# EAGLE board MINHF4 (EAGLE 9.2.2)
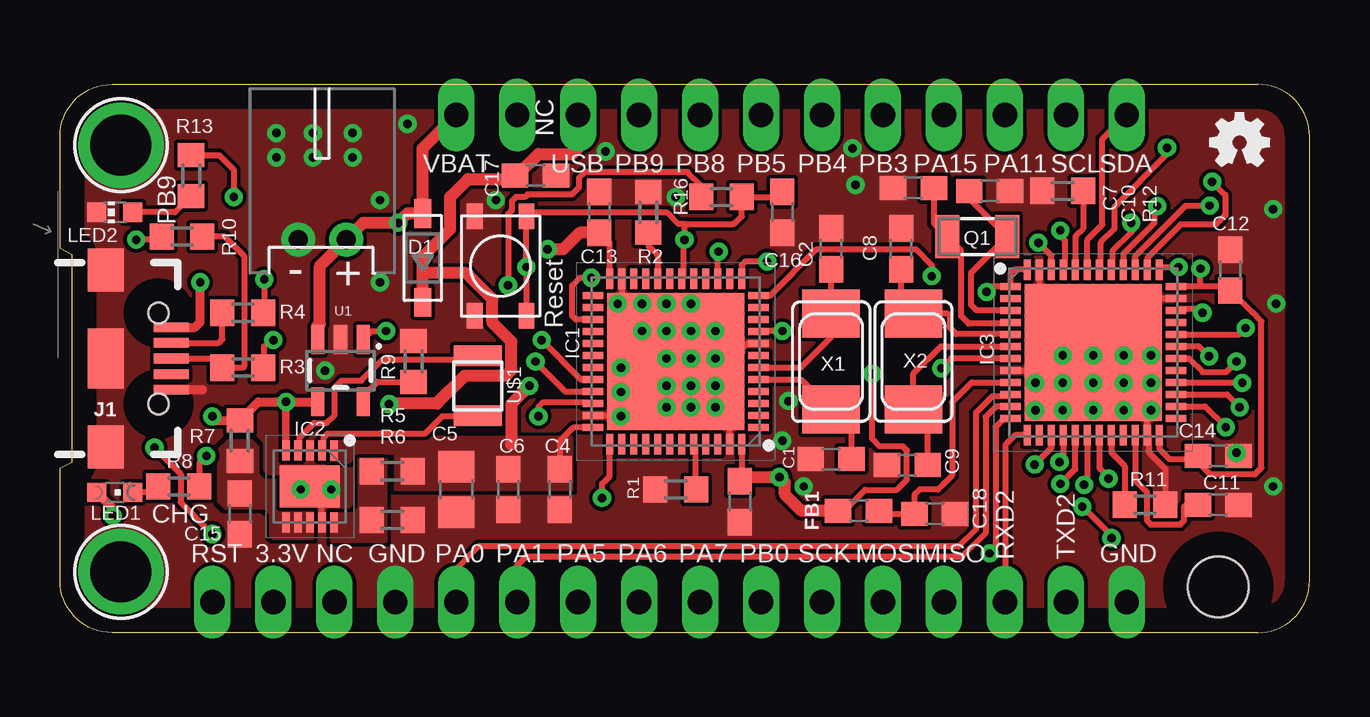
[diagram p0: board, top side]
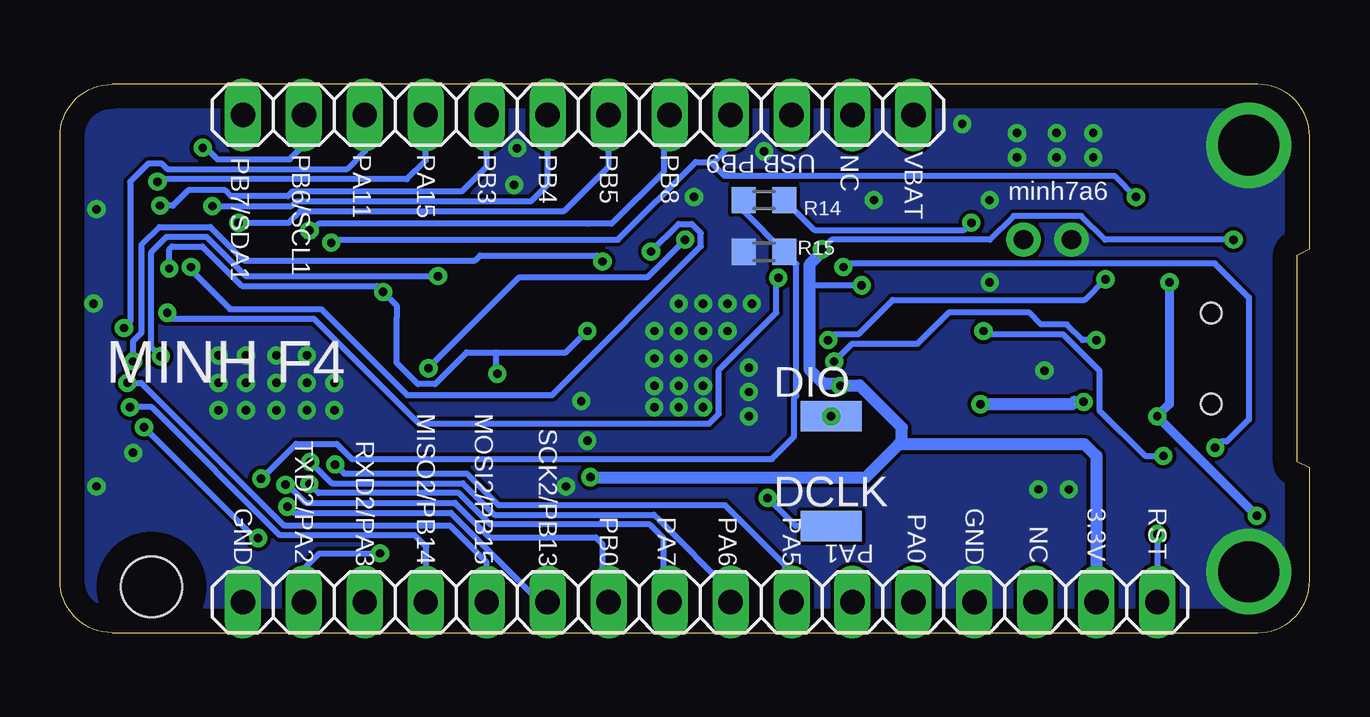
[diagram p1: board, bottom side, seen from below]

Size 52.07 x 22.86 mm. Coordinates in mm from the lower left corner, seen from the top.
Outline: 0,16 0,20.69 arc-90 2.17,22.86 49.9,22.86 arc-90 52.07,20.69 52.07,2.17 arc-90 49.9,0 2.17,0 arc-90 0,2.17 0,6.86 0.51,7.11 0.51,15.75 0,16
Copper layers (1*16): Top 0.035mm / dielectric 1.5mm / Bottom 0.035mm
Design rules "default *": minimum track width 6mil, minimum drill 0.35mm, track to track 6mil, track to pad 6mil, pad to pad 6mil, via to via 6mil, smd to smd 6mil, copper to edge 40mil, drill to drill 6mil, minimum pad ring 10mil, minimum via ring 8mil, stop-mask expansion 4mil, vias tented up to drill 15mil, thermal gap 10mil
Holes 2.54 mm at 48.26,1.91

## Footprints (pad centres in the part's own frame; a part is rotated, then mirrored left to right if it is on the bottom)
C0603 = smd 1.1 x 1: 1 -0.85,0; 2 0.85,0
C0805 = smd 1.3 x 1.5: 1 -0.95,0; 2 0.95,0
JST-PH-2-THM-RA = drill 0.8 pad 1.422: 1 1,0; 2 -1,0
SOD-123 = smd 1.2 x 0.7: A 1.85,0; C -1.85,0
SMD1,27-2,54 = smd 1.27 x 2.54: 1 0,0
0603 = smd 1.1 x 1: 1 -0.85,0; 2 0.85,0
QFN50P700X700X65-49N = smd 0.85 x 0.3: 1 -3.45,2.75; 2 -3.45,2.25; 3 -3.45,1.75; 4 -3.45,1.25; 5 -3.45,0.75; 6 -3.45,0.25; 7 -3.45,-0.25; 8 -3.45,-0.75; 9 -3.45,-1.25; 10 -3.45,-1.75; 11 -3.45,-2.25; 12 -3.45,-2.75; 25 3.45,-2.75; 26 3.45,-2.25; 27 3.45,-1.75; 28 3.45,-1.25; 29 3.45,-0.75; 30 3.45,-0.25; 31 3.45,0.25; 32 3.45,0.75; 33 3.45,1.25; 34 3.45,1.75; 35 3.45,2.25; 36 3.45,2.75 | smd 0.3 x 0.85: 13 -2.75,-3.45; 14 -2.25,-3.45; 15 -1.75,-3.45; 16 -1.25,-3.45; 17 -0.75,-3.45; 18 -0.25,-3.45; 19 0.25,-3.45; 20 0.75,-3.45; 21 1.25,-3.45; 22 1.75,-3.45; 23 2.25,-3.45; 24 2.75,-3.45; 37 2.75,3.45; 38 2.25,3.45; 39 1.75,3.45; 40 1.25,3.45; 41 0.75,3.45; 42 0.25,3.45; 43 -0.25,3.45; 44 -0.75,3.45; 45 -1.25,3.45; 46 -1.75,3.45; 47 -2.25,3.45; 48 -2.75,3.45 | smd 5.7 x 5.7: 49 0,0
SON50P300X300X100-11N = smd 0.85 x 0.3: 1 -1.5,1; 2 -1.5,0.5; 3 -1.5,0; 4 -1.5,-0.5; 5 -1.5,-1; 6 1.5,-1; 7 1.5,-0.5; 8 1.5,0; 9 1.5,0.5; 10 1.5,1 | smd 1.75 x 2.5: 11 0,0
QFN50P700X700X60-49N = smd 0.85 x 0.3: 1 -3.45,2.75; 2 -3.45,2.25; 3 -3.45,1.75; 4 -3.45,1.25; 5 -3.45,0.75; 6 -3.45,0.25; 7 -3.45,-0.25; 8 -3.45,-0.75; 9 -3.45,-1.25; 10 -3.45,-1.75; 11 -3.45,-2.25; 12 -3.45,-2.75; 25 3.45,-2.75; 26 3.45,-2.25; 27 3.45,-1.75; 28 3.45,-1.25; 29 3.45,-0.75; 30 3.45,-0.25; 31 3.45,0.25; 32 3.45,0.75; 33 3.45,1.25; 34 3.45,1.75; 35 3.45,2.25; 36 3.45,2.75 | smd 0.3 x 0.85: 13 -2.75,-3.45; 14 -2.25,-3.45; 15 -1.75,-3.45; 16 -1.25,-3.45; 17 -0.75,-3.45; 18 -0.25,-3.45; 19 0.25,-3.45; 20 0.75,-3.45; 21 1.25,-3.45; 22 1.75,-3.45; 23 2.25,-3.45; 24 2.75,-3.45; 37 2.75,3.45; 38 2.25,3.45; 39 1.75,3.45; 40 1.25,3.45; 41 0.75,3.45; 42 0.25,3.45; 43 -0.25,3.45; 44 -0.75,3.45; 45 -1.25,3.45; 46 -1.75,3.45; 47 -2.25,3.45; 48 -2.75,3.45 | smd 5.7 x 5.7: 49 0,0
USB-B-MICRO-SMD = smd 1.45 x 0.4: D+ 2.725,0; D- 2.725,0.65; GND 2.725,-1.3; ID 2.725,-0.65; VBUS 2.725,1.3 | smd 1.5 x 1.8: SHIELD1 0,3.685; SHIELD2 0,-3.685 | smd 1.5 x 2.5: SHIELD3 0,0 | hole 0.85: 2.2,1.9; 2.2,-1.9
1X12 = drill 1.016 long: 1 -13.97,0; 2 -11.43,0; 3 -8.89,0; 4 -6.35,0; 5 -3.81,0; 6 -1.27,0; 7 1.27,0; 8 3.81,0; 9 6.35,0; 10 8.89,0; 11 11.43,0; 12 13.97,0
1X16 = drill 1.016 long: 1 -19.05,0; 2 -16.51,0; 3 -13.97,0; 4 -11.43,0; 5 -8.89,0; 6 -6.35,0; 7 -3.81,0; 8 -1.27,0; 9 1.27,0; 10 3.81,0; 11 6.35,0; 12 8.89,0; 13 11.43,0; 14 13.97,0; 15 16.51,0; 16 19.05,0
CHIPLED_0603 = smd 0.8 x 0.8: A 0,-0.75; C 0,0.75
CHIP-LED0603 = smd 0.8 x 0.8: A 0,-0.75; C 0,0.75
3.2X1.5 = smd 1 x 1.8: 1 -1.25,0; 2 1.25,0
R0603 = smd 1 x 1.1: 1 -0.85,0; 2 0.85,0
SOT23-5 = smd 0.55 x 1.2: 1 -0.95,-1.3; 2 0,-1.3; 3 0.95,-1.3; 4 0.95,1.3; 5 -0.95,1.3
SWPA25012S = smd 0.85 x 2: P$1 -1.25,0; P$2 1.25,0
4.2X3.25 = smd 1.05 x 0.65: P$1 0,0; P$2 4.15,0; P$3 4.15,2.15; P$4 0,2.15
NX5032 = smd 2 x 2.4: P$1 2,0; P$2 -2,0

## Placement (x,y rotation side)
C1  22pF  [C0603]  32.13,7.24 180 top
C2  22pF  [C0603]  32.13,16 90 top
C3  100nF  [C0603]  28.32,5.46 270 top
C4  100nF  [C0603]  20.83,5.97 270 top
C5  10uF  [C0805]  16.51,5.97 270 top
C6  10uF  [C0603]  18.67,5.97 270 top
C7  6.8pF  [C0603]  35.56,18.54 180 top
C8  22pF  [C0603]  35.05,16 90 top
C9  22pF  [C0603]  35.31,6.99 180 top
C10  6.8pF  [C0603]  38.73,18.41 0 top
C11  4.7uF  [C0603]  48.26,5.33 0 top
C12  100nF  [C0603]  48.77,15.11 90 top
C13  100nF  [C0603]  22.48,17.53 90 top
C14  100nF  [C0603]  48.26,7.37 0 top
C15  100nF  [C0603]  7.49,4.95 270 top
C16  100nF  [C0603]  30.1,17.53 270 top
C17  10uF  [C0603]  19.81,19.05 0 top
C18  100nF  [C0603]  36.45,4.95 0 top
CN1  [JST-PH-2-THM-RA]  10.92,16.38 0 top
D1  [SOD-123]  15.11,15.62 90 top
DCLK  [SMD1,27-2,54]  19.94,4.45 270 bottom
DIO  [SMD1,27-2,54]  19.94,9.02 270 bottom
FB1  30O/1.8A  [0603]  33.27,5.08 0 top
IC1  STM32F103CBU6  [QFN50P700X700X65-49N]  25.65,11.3 180 top
IC2  TPS63000DRCT  [SON50P300X300X100-11N]  10.41,6.1 270 top
IC3  STM32F411CEU6  [QFN50P700X700X60-49N]  43.05,11.68 0 top
J1  [USB-B-MICRO-SMD]  1.91,11.43 0 top
JP1  [1X12]  30.48,21.59 0 bottom
JP2  [1X16]  25.4,1.27 180 bottom
LED1  [CHIPLED_0603]  2.29,5.84 270 top
LED2  [CHIP-LED0603]  2.29,17.53 90 top
LOGO1  OSHW-LOGOMINI  [OSHW-LOGO-MINI]  49.15,20.45 0 top
Q1  [3.2X1.5]  38.23,16.51 180 top
R1  100k  [R0603]  25.65,5.97 180 top
R2  100k  [R0603]  24.51,17.53 270 top
R3  22  [R0603]  7.62,11.05 180 top
R4  22  [R0603]  7.62,13.34 180 top
R5  1M  [R0603]  13.84,6.73 0 top
R6  178k  [R0603]  13.84,4.7 180 top
R7  100k  [R0603]  7.49,8 90 top
R8  1k  [R0603]  4.95,6.1 180 top
R9  10k  [R0603]  14.73,11.3 90 top
R10  10k  [R0603]  5.08,16.51 180 top
R11  10k  [R0603]  45.21,5.33 180 top
R12  10k  [R0603]  41.78,18.41 180 top
R13  1k  [R0603]  5.46,19.05 270 top
R14  100k  [R0603]  22.73,18.03 0 bottom
R15  100k  [R0603]  22.73,15.88 0 bottom
R16  10k  [R0603]  27.56,18.16 180 top
U1  MCP73831  [SOT23-5]  11.68,10.92 180 top
U$1  SWPA252012S-INDUCTOR  [SWPA25012S]  17.4,10.29 270 top
U$2  4.2X3.25-TACTILE-SWITCH  [4.2X3.25]  19.43,13.21 90 top
X1  [NX5032]  32.13,11.3 90 top
X2  [NX5032]  35.56,11.3 90 top

## Library data of the parts
C1-C18 = rcl; SPICEPREFIX: C
CN1 D1 X1 X2 = adafruit
DCLK DIO = wirepad
FB1 = SPEAR; PROD_ID: NDUC-13805
IC1 = LCSC; ALLIED_NUMBER: 70521209; ALLIED_PRICE-STOCK: http://www.alliedelec.com/stmicroelectronics-stm32f103cbu6/70521209/; HEIGHT: 0.65mm; MANUFACTURER_NAME: STMicroelectronics; MANUFACTURER_PART_NUMBER: STM32F103CBU6; MOUSER_PART_NUMBER: 511-STM32F103CBU6; MOUSER_PRICE-STOCK: https://www.mouser.com/Search/Refine.aspx?Keyword=511-STM32F103CBU6; RS_PART_NUMBER: 1687243; RS_PRICE-STOCK: http://uk.rs-online.com/web/p/products/1687243
IC2 = LCSC; DESCRIPTION: TPS63000DRCT Buck/Boost Converter, 1.2A, Adjustable, 1.2 5.5 V, 1500 kHz, 10-Pin SON EP; HEIGHT: 1mm; MANUFACTURER_NAME: Texas Instruments; MANUFACTURER_PART_NUMBER: TPS63000DRCT; MOUSER_PART_NUMBER: 595-TPS63000DRCT; MOUSER_PRICE-STOCK: https://www.mouser.com/Search/Refine.aspx?Keyword=595-TPS63000DRCT; RS_PART_NUMBER: 0389334P; RS_PRICE-STOCK: http://uk.rs-online.com/web/p/products/0389334P
IC3 = LCSC; ARROW_PART_NUMBER: STM32F411CEU6; DESCRIPTION: 32-Bit MCU 512K Flash 100MHz UFQFPN48 STMicroelectronics STM32F411CEU6, 32bit ARM Cortex M4 MCU, 100MHz, 512 kB Flash, 48-Pin UFQFPN; HEIGHT: 0.6mm; MANUFACTURER_NAME: STMicroelectronics; MANUFACTURER_PART_NUMBER: STM32F411CEU6
J1 = SparkFun-Connectors; PROD_ID: CONN-11752
JP1 JP2 = pinhead
LED1 LED2 = led
LOGO1 = SparkFun-Aesthetics
Q1 = crystal-geyer_V1_0
R1-R16 = rcl; SPICEPREFIX: R
U1 = SparkFun-IC-Power; PROD_ID: IC-09995
U$1 U$2 = LCSC

## Nets
3.3V: C3.1 C4.1 C5.1 C6.1 C12.1 C13.1 C14.1 FB1.1 IC1.9 IC1.24 IC1.36 IC1.48 IC2.1 IC3.1 IC3.24 IC3.36 IC3.48 JP2.2 R5.2 R10.2 R16.2
5V: C17.1 D1.C IC2.5 J1.VBUS JP1.10 LED1.A R7.2 U1.4
D+: J1.D+ R3.2 R10.1
D-: J1.D- R4.2
DCLK: DCLK.1 IC1.37
DIO: DIO.1 IC1.34
EN: JP1.11
GND: C1.2 C2.2 C3.2 C4.2 C5.2 C6.2 C7.2 C8.2 C9.2 C10.2 C11.2 C12.2 C13.2 C14.2 C15.2 C16.2 C17.2 C18.2 CN1.2 IC1.8 IC1.23 IC1.35 IC1.47 IC1.49 IC2.3 IC2.9 IC2.11 IC3.8 IC3.23 IC3.35 IC3.47 IC3.49 J1.GND J1.SHIELD1 J1.SHIELD2 J1.SHIELD3 JP2.4 JP2.16 LED2.C R1.2 R2.1 R6.1 R9.2 R11.1 R12.2 R15.1 U1.2 U$2.P$3 U$2.P$4
MISO: IC3.27 JP2.13
MOSI: IC3.28 JP2.12
N$1: C15.1 IC2.6 IC2.7 IC2.8 R7.1
N$2: IC2.2 U$1.P$2
N$3: C1.1 IC1.5 X1.P$2
N$4: C2.1 IC1.6 X1.P$1
N$5: IC1.44 R1.1
N$6: IC2.4 U$1.P$1
N$7: IC1.20 R2.2
N$8: IC1.33 R3.1
N$9: IC1.32 R4.1
N$10: LED1.C R8.2
N$11: R8.1 U1.1
N$12: R9.1 U1.5
N$13: LED2.A R13.2
N$14: IC2.10 R5.1 R6.2
N$15: C7.1 IC3.4 Q1.2
N$16: C10.1 IC3.3 Q1.1
N$17: C18.1 FB1.2 IC3.9
N$18: C8.1 IC3.5 X2.P$1
N$19: C9.1 IC3.6 X2.P$2
N$20: C11.1 IC3.22
N$21: IC3.20 R11.2
N$25: IC3.33
N$27: IC3.29
N$31: IC3.25
N$33: IC3.44 R12.1
N$47: IC3.21
NC: JP2.3
PA0: IC3.10 JP2.5
PA1: IC3.11 JP2.6
PA4: IC3.14
PA5: IC3.15 JP2.7
PA6: IC3.16 JP2.8
PA7: IC3.17 JP2.9
PA11: IC3.32 JP1.3
PA15: IC3.38 JP1.4
PB0: IC3.18 JP2.10
PB1: IC3.19 R14.1 R15.2
PB3: IC3.39 JP1.5
PB4: IC3.40 JP1.6
PB5: IC3.41 JP1.7
PB8: IC3.45 JP1.8
PB9: IC3.46 JP1.9 R13.1
RST: C16.1 IC1.18 IC3.7 JP2.1 R16.1 U$2.P$1 U$2.P$2
RXD: IC1.12 IC3.31
RXD_2: IC3.13 JP2.14
SCK: IC3.26 JP2.11
SCL: IC3.42 JP1.2
SDA: IC3.43 JP1.1
SWCLK: IC1.15 IC3.37
SWDIO: IC1.27 IC3.34
TXD: IC1.13 IC3.30
TXD_2: IC3.12 JP2.15
VBAT: CN1.1 D1.A JP1.12 R14.2 U1.3

## Tracks (layer width: path | path; a pad name or v marks a point on that pad's centre or on a via)
3.3V  (via drill 0.35)
  Top 0.254: 47.62,14.43 48.6,14.43 C12.1 49.67,13.36 50.06,12.97 50.06,6.87 49.78,6.59 47.94,6.59 47.28,7.24 | 47.62,14.43 IC3.36 | IC1.24 22.9,16.25 C13.1 | IC3.24 45.8,7.66 46.23,7.24 47.28,7.24 | 47.28,7.24 C14.1 | C6.1 18.75,6.9 | IC1.36 21.38,8.55 20.83,8 C4.1 | IC3.48 39.77,15.13 39.6,14.96 IC3.1 38.84,14.43 v38.61,14.2 | v30.1,12.57 29.12,12.57 IC1.9 | 47.62,14.43 47.52,14.54 v47.52,15.18 | R10.2 4.1,16.38 v3.17,16.38 | FB1.1 32.68,5.08 33.55,5.95 34.87,5.95 35.28,6.37 35.28,7.6 35.12,7.76 34.15,7.76 33.85,8.06 v33.85,10.79 | R16.2 26.71,18.64 26.14,19.2 21.86,19.2 21.62,18.96 21.62,18.56 21.33,18.27 19.48,18.27 19.38,18.16 18.99,18.16 18.83,18 18.83,17.61 18.67,17.45 v18.67,14.48 | IC1.48 28.4,6.6 28.4,6.48 28.4,6.39 C3.1
  Top 0.508: 18.8,7.85 18.8,7.86 18.8,9.53 v19.56,10.29 | FB1.1 30.89,5.08 30.2,5.77 30.2,6.25 v29.97,6.48 28.4,6.48 | C13.1 21.66,16.68 21.39,16.41 20.95,15.98 v20.32,15.98
  Bottom 0.254: 33.91,11.68 35.13,11.68 36.45,10.37 37.16,10.37 38.05,11.25 38.05,13.13 38.05,13.64 v38.61,14.2 38.86,14.45 44.49,14.45 46.14,16.1 47.4,16.1 47.52,15.98 v47.52,15.18 | 33.91,11.68 30.99,11.68 v30.1,12.57 | 33.91,11.68 33.91,10.86 v33.85,10.79 | v3.17,16.38 8.52,16.38 9.51,17.37 12.33,17.37 13.32,16.38 19.91,16.38 v20.32,15.98 | v18.67,14.48 20.85,14.48
  Bottom 0.508: 16.99,7.85 16.99,8.55 18.75,10.31 19.53,10.31 v19.56,10.29 19.66,10.39 20.26,10.39 20.85,10.98 20.85,13.08 20.85,13.84 20.85,14.22 20.85,14.48 20.85,15.34 20.45,15.75 20.45,15.85 v20.32,15.98 | v29.97,6.48 18.5,6.48 17.12,7.85 16.99,7.85 | 16.99,7.85 9.38,7.85 8.89,7.37 JP2.2
  pour Top (no thermals): 11.3,7.11 12.06,7.11 12.19,7.24 12.19,7.49 13.97,7.49 13.97,5.97 21.34,5.97 21.34,8.13 11.3,8.13
5V  (via drill 0.35)
  Top 0.305: IC2.5 v9.41,9.62
  Top 0.381: J1.VBUS 5.62,12.73 5.84,12.95 v5.84,14.61 | v6.35,9.02 6.52,8.85 R7.2 8.26,9.62 9.02,9.62 v9.41,9.62 v9.42,9.62 U1.4 | LED1.A 2.2,5.17 v2.2,4.87
  Top 0.508: v13.72,9.53 13.74,9.55 15.7,9.55 16.86,10.71 18.57,10.71 18.8,10.94 18.8,12.13 18.01,12.92 18.01,13.9 16.93,14.99 15.11,14.99 | JP1.10 21.59,20.19 21.35,19.96 19.94,19.96 19.04,19.05 C17.1 18.82,18.91 17,18.91 16.26,18.16 16.26,16.82 15.11,15.68 15.11,14.99 | D1.C 15.11,14.99
  Bottom 0.381: v5.84,14.61 5.84,9.53 v6.35,9.02 v2.2,4.87
  Bottom 0.508: v13.72,9.53 9.9,9.53 9.8,9.62 v9.42,9.62
D+
  Top 0.254: J1.D+ 6.39,11.43 R3.2 7.62,11.05 7.69,11.12 7.69,15.68 6.86,16.51 R10.1
D-
  Top 0.254: J1.D- 6.62,12.08 6.77,12.23 R4.2
DCLK  (via drill 0.35)
  Top 0.254: v22.59,5.61 22.59,6.2 22.9,6.52 IC1.37
  Bottom 0.254: DCLK.1 21.42,4.45 v22.59,5.61
DIO  (via drill 0.35)
  Top 0.254: IC1.34 22.06,9.55 22.01,9.61 20.14,9.61 19.94,9.41 DIO.1
  other vias: 19.94,9.02
GND  (via drill 0.35, 2.54)
  Top 0.254: v45.47,9.27 45.3,9.11 IC3.23 45.37,8.16 45.37,7.52 46.06,6.83 46.06,6.35 R11.1 | IC1.47 27.9,8.76 | 27.9,8.76 27.9,10.83 v27.3,11.43 28.19,11.43 28.4,11.64 28.4,11.82 28.63,12.05 IC1.8 | IC1.23 23.4,13.88 v23.24,13.72 | IC1.35 27.61,9.05 27.9,8.76 | IC3.8 40.37,10.93 40.64,10.67 v40.64,10.41 | IC3.47 40.8,12.54 v41.78,11.56 | IC3.35 45.63,13.93 45.47,14.1 v45.47,11.56 | IC2.9 10.91,5.58 v11.3,5.97
  Top 0.381: J1.GND 5.94,10.13
  other vias: 40.64,9.27 41.78,9.27 43.05,9.27 44.32,9.27 43.05,10.41 44.32,10.41 45.47,10.41 41.78,10.41 43.05,11.56 44.32,11.56 24.26,13.72 25.27,13.72 26.29,13.72 24.26,12.57 25.27,12.57 26.29,12.57 27.3,12.57 26.29,11.43 9.02,20.83 10.54,20.83 11.05,10.92 22.73,20.07 18.16,18.03 50.55,6.1 12.19,20.83 50.67,13.72 50.55,17.65 49.02,7.49 12.19,19.81 10.54,19.81 9.02,19.81 30.99,6.1 13.34,14.61 25.27,11.43 25.27,10.29 26.29,10.29 2.54,20.32 2.54,2.54 27.3,10.29 25.27,9.4 26.29,9.4 27.3,9.4 33.02,20.19 33.15,18.67 23.37,11.05 23.37,10.03 23.37,9.02 30.35,9.65 30.1,8 13.34,18.03 14.48,21.21 25.65,18.16 10.03,5.97
  pour Top (rank 6, no thermals): -0.25,24.77 -0.25,-0.64 53.21,-0.64 53.21,24.77
  pour Bottom (rank 6, no thermals): -0.25,23.75 -0.25,-0.64 52.45,-0.64 52.45,23.75
MISO  (via drill 0.35)
  Top 0.254: IC3.27 48.62,9.93 v49.15,9.4
  Bottom 0.254: v49.15,9.4 48.25,9.4 42.91,4.06 37.29,4.06 36.81,3.57 36.81,1.37 36.83,1.35 JP2.13
MOSI  (via drill 0.35)
  Top 0.254: IC3.28 49.24,10.43 v49.26,10.41
  Bottom 0.254: v49.26,10.41 48.69,10.41 42.74,4.47 35.83,4.47 34.29,2.93 JP2.12
N$1
  pour Top (no thermals): 6.86,5.21 8.51,5.21 8.76,4.95 8.76,4.06 8.89,3.94 10.54,3.94 10.54,5.21 9.4,6.35 8.51,6.35 8.26,6.6 8.26,7.75 8,8 6.99,8 6.6,7.62 6.6,5.46
N$2
  Top 0.152: 17.39,9.03 U$1.P$2
  Top 0.254: IC2.2 10.98,7.67 10.98,8.14 11.15,8.3 15.21,8.3 15.94,9.03 17.39,9.03
N$3
  Top 0.254: IC1.5 30.88,10.55 X1.P$2 32.98,8.45 C1.1
N$4
  Top 0.254: C2.1 X1.P$1 32.13,12.32 30.86,11.05 IC1.6
N$5
  Top 0.254: R1.1 26.48,6 26.48,7.78 IC1.44
N$6
  Top 0.254: IC2.4 9.98,7.67 9.98,8.14 10.59,8.74 11.12,8.74 11.45,9.06 11.45,10.21 11.73,10.5 12.56,10.5 13.43,11.37 17.24,11.37 U$1.P$1
N$7
  Top 0.254: R2.2 24.51,16.13 24.9,15.74 IC1.20
N$8  (via drill 0.35)
  Top 0.254: R3.1 8.51,11.09 8.51,11.94 8.76,12.19 v8.89,12.19 | v19.81,11.3 21.06,10.05 IC1.33
  Bottom 0.254: v8.89,12.19 9.46,12.19 10.12,12.85 11.2,12.85 11.68,13.34 15.05,13.34 16.34,12.04 19.07,12.04 v19.81,11.3
N$9  (via drill 0.35)
  Top 0.254: IC1.32 21.7,10.55 v20.07,12.19 | v8.51,14.73 8.51,13.37 R4.1
  Bottom 0.254: v20.07,12.19 19.81,12.45 18.8,12.45 17.37,13.87 9.37,13.87 v8.51,14.73
N$10
  Top 0.254: R8.2 3.85,5.84 LED1.C
N$11  (via drill 0.35)
  Top 0.254: v6.1,7.37 5.8,7.07 R8.1 | U1.1 12.98,12.57 v13.59,12.57
  Bottom 0.254: v6.1,7.37 6.86,7.37 8.76,9.27 8.76,10.92 10.29,12.45 13.46,12.45 v13.59,12.57
N$12
  Top 0.254: U1.5 12.63,9.88 13.21,10.45 R9.1
N$13
  Top 0.254: R13.2 4.79,17.53 LED2.A
N$14
  pour Top (rank 2, no thermals): 11.3,4.95 11.3,3.81 13.59,3.81 13.59,7.49 12.45,7.49 12.45,5.21 12.19,4.95
N$15
  Top 0.254: IC3.4 39.55,12.88 37.86,12.88 37.54,13.19 37.54,15.94 36.97,16.52 | C7.1 36.41,17.08 36.97,16.52 | Q1.2 36.97,16.52
N$16
  Top 0.254: C10.1 37.88,18.1 Q1.1 37.95,14.98 37.95,13.68 38.19,13.43 IC3.3
N$17
  Top 0.254: IC3.9 37.99,10.43 37.17,9.61 37.17,6.56 36.82,6.21 36.81,6.21 36.58,5.97 35.81,5.97 35.6,5.75 C18.1 34.25,4.95 FB1.2
N$18
  Top 0.254: C8.1 35.05,13.81 X2.P$1 35.81,13.3 36.99,13.3 37.08,13.21 37.08,12.7 37.34,12.45 39.59,12.45 IC3.5
N$19
  Top 0.254: C9.1 36.16,8.71 X2.P$2 35.56,10.79 36.7,11.93 IC3.6
N$20
  Top 0.254: IC3.22 44.8,6.34 45.28,5.86 45.28,4.67 45.45,4.5 46.68,4.5 46.84,4.67 46.84,5.25 46.93,5.33 C11.1
N$21
  Top 0.254: IC3.20 43.8,7.5 44.36,6.95 R11.2
N$33
  Top 0.254: R12.1 42.63,16.85 42.3,16.52 IC3.44
PA0
  Top 0.254: IC3.10 39.53,9.86 38.86,9.86 38.16,9.16 38.16,4.31 37.44,3.58 17.43,3.58 16.51,2.67 JP2.5
PA1
  Top 0.254: IC3.11 39.01,9.43 38.56,8.99 38.56,4.14 37.6,3.17 19.43,3.17 19.05,2.79 JP2.6
PA5  (via drill 0.35)
  Top 0.254: IC3.15 41.3,7.7 v40.61,7
  Bottom 0.254: v40.61,7 40.23,6.63 35.11,6.63 33.8,5.32 24.37,5.32 21.84,2.79 21.84,1.52 JP2.7
PA6  (via drill 0.35)
  Top 0.254: IC3.16 41.8,7.4 41.65,7.24 v41.65,7.11
  Bottom 0.254: v41.65,7.11 40.75,6.22 35.28,6.22 33.97,4.91 27.32,4.91 27.08,4.67 24.14,1.73 24.14,1.3 JP2.8
PA7  (via drill 0.35)
  Top 0.254: v41.68,6.2 42.3,6.82 42.3,7.75 IC3.17
  Bottom 0.254: v41.68,6.2 41.3,5.81 35.45,5.81 34.14,4.51 27.49,4.51 27.11,4.13 26.92,3.94 26.92,1.52 JP2.9
PA11  (via drill 0.35)
  Top 0.254: v49.4,12.7 49.14,12.43 IC3.32
  Bottom 0.254: JP1.3 39.37,20.07 40.11,19.33 47.61,19.33 47.84,19.56 48.39,19.56 49.15,18.8 49.15,12.95 v49.4,12.7
PA15  (via drill 0.35)
  Top 0.254: v48.01,18.8 48.56,18.24 48.56,17.4 48.17,17.02 46.7,17.02 45.3,15.62 IC3.38
  Bottom 0.254: v48.01,18.8 47.9,18.9 37.62,18.9 36.83,19.68 JP1.4
PB0  (via drill 0.35)
  Top 0.254: IC3.18 42.8,6.29 v42.67,6.16
  Bottom 0.254: v42.67,6.16 42.55,6.04 42.45,6.04 41.82,5.41 35.62,5.41 34.19,3.98 29.76,3.98 29.46,3.68 29.46,1.52 JP2.10
PB1  (via drill 0.35)
  Top 0.254: IC3.19 43.31,6.86 43.69,6.48 v43.69,6.42
  Bottom 0.254: R14.1 23.58,17.57 R15.2 21.38,15.38 21.38,9.87 21.49,9.77 21.49,8.16 22.41,7.24 39.91,7.24 40.55,7.87 42.23,7.87 v43.69,6.42
PB3  (via drill 0.35)
  Top 0.254: IC3.39 44.8,15.7 46.91,17.8 v47.9,17.8
  Bottom 0.254: v47.9,17.8 47.37,17.8 46.73,18.44 45.19,18.44 44.95,18.2 42.58,18.2 42.38,18.39 35.33,18.39 34.29,19.43 JP1.5
PB4  (via drill 0.35)
  Top 0.254: v45.72,17.78 45.59,17.66 45.59,17.06 44.3,15.77 IC3.40
  Bottom 0.254: v45.72,17.78 42.42,17.78 42.22,17.98 32.44,17.98 31.75,18.67 JP1.6
PB5  (via drill 0.35)
  Top 0.254: IC3.41 43.87,15.21 43.87,15.92 44.63,16.68 v44.63,17.09
  Bottom 0.254: v44.63,17.09 42.54,17.09 42.05,17.58 31.06,17.58 29.21,19.43 JP1.7
PB8  (via drill 0.35)
  Top 0.254: v41.68,16.76 41.8,16.64 41.8,16.43 41.86,16.37 41.86,15.19 IC3.45
  Bottom 0.254: v41.68,16.76 41.57,16.76 41.29,17.04 30.1,17.04 29.08,17.04 26.92,19.2 26.92,21.34 JP1.8
PB9  (via drill 0.35)
  Top 0.254: IC3.46 41.3,15.72 v40.77,16.26 | v7.24,18.16 7.24,19.3 6.64,19.9 R13.1
  Bottom 0.254: v40.77,16.26 40.64,16.38 28.83,16.38 25.59,19.62 24.83,19.62 24.45,20 | 24.45,20 24.89,19.56 24.38,19.05 8.13,19.05 v7.24,18.16 | 24.45,20 24.38,20.07 24.32,20.13 | 24.32,20.13 24.13,20.32 | JP1.9 24.13,20.32 | 24.13,20.32 24.32,20.13
RST  (via drill 0.35)
  Top 0.254: IC3.7 37.13,11.43 v36.72,11.02 | IC1.18 25.98,14.82 25.98,16.34 v26.02,16.38 26.02,17.03 | v3.94,7.71 5.02,6.62 5.02,5.43 v6.35,4.1 | C16.1 29.88,18.16 R16.1 28.41,17.36 28.08,17.03 26.02,17.03 | 26.02,17.03 25.77,17.03 25.29,17.5 19.58,17.5 U$2.P$2 v19.43,15.24 U$2.P$1
  Bottom 0.254: v26.02,16.38 27.59,14.81 32.93,14.81 v36.72,11.02 | v3.94,7.71 3.69,7.96 3.46,7.96 2.54,8.88 2.54,13.98 3.95,15.39 19.28,15.39 v19.43,15.24 | v6.35,4.1 JP2.1
RXD  (via drill 0.35)
  Top 0.254: IC1.12 29.59,14.05 31.52,15.98 33,15.98 35.67,15.98 36.32,15.33 v36.32,14.86 | v47.88,11.52 47.47,11.93 IC3.31
  Bottom 0.254: v47.88,11.52 48.26,11.9 48.26,15.88 47.62,16.51 45.97,16.51 44.32,14.86 39.62,14.86 v36.32,14.86
RXD_2
  Top 0.254: IC3.13 39.8,8.23 39.41,7.85 39.41,1.31 JP2.14
SCK  (via drill 0.35)
  Top 0.254: IC3.26 47.7,9.43 v48.57,8.57 | v42.6,5.25 43.81,4.03 v43.81,3.94
  Bottom 0.254: v48.57,8.57 43.92,3.91 v43.81,3.94 | v42.6,5.25 42.34,5 35.79,5 32.05,1.27 JP2.11
SCL  (via drill 0.35)
  Top 0.254: v46.12,20.21 46.12,19.94 43.94,17.76 43.94,16.84 43.37,16.27 43.37,15.21 IC3.42
  Bottom 0.254: v46.12,20.21 45.99,20.21 45.52,19.74 42.49,19.74 41.91,20.32 JP1.2
SDA
  Top 0.254: IC3.43 42.8,16.39 43.43,17.02 43.43,20.57 JP1.1
SWCLK  (via drill 0.35)
  Top 0.254: IC1.15 27.4,15.85 v27.45,15.89 | IC3.37 45.91,15.24 v46.61,15.24
  Bottom 0.254: v27.45,15.89 26.29,17.04 25.75,17.04 25.36,16.66 25.36,16.11 31.57,9.91 31.75,9.91 37.61,9.91 41.19,13.49 44.98,13.49 46.61,15.11 v46.61,15.24
SWDIO  (via drill 0.35)
  Top 0.254: v47.6,13.34 47.45,13.49 46.56,13.49 IC3.34 | IC1.27 21.49,13.05 21.34,13.21 21.34,14.48 21.65,14.79 v22.14,14.79
  Bottom 0.254: v47.6,13.34 47.6,13.32 47.36,13.08 41.48,13.08 37.12,8.71 25.03,8.71 24.61,9.13 24.61,10.95 22.23,13.34 22.23,14.71 v22.14,14.79
TXD  (via drill 0.35)
  Top 0.254: IC3.30 47.04,11.43 47.61,10.87 48.58,10.87 v49.02,11.3 | v29.46,15.47 28.55,15.47 28.4,15.32 IC1.13
  Bottom 0.254: v49.02,11.3 49.02,12.15 48.67,12.51 48.67,16.17 47.92,16.92 45.81,16.92 44.41,15.52 34.77,15.52 34.57,15.72 29.71,15.72 v29.46,15.47
TXD_2  (via drill 0.35)
  Top 0.254: IC3.12 39.35,8.93 38.99,8.57 38.99,3.56 v38.73,3.3
  Bottom 0.254: v38.73,3.3 41.27,3.3 41.91,2.67 JP2.15
VBAT  (via drill 0.35)
  Top 0.508: JP1.12 15.11,20.19 D1.A 14.48,17.47 v14.1,17.09 12.63,17.09 CN1.1 10.83,15.29 10.83,12.88 10.73,12.79 U1.3
  Bottom 0.254: R14.2 20.64,16.79 14.4,16.79 v14.1,17.09

## Text on the board
tPlace: NC | VBAT | USB | PB9 | PB8 | PB5 | PB4 | PB3 | PA15 | PA11 | SCL | SDA | PB9 | Reset | CHG | RST | 3.3V | NC | GND | PA0 | PA1 | PA5 | PA6 | PA7 | PB0 | SCK | MOSI | MISO | RXD2 | TXD2 | GND
bPlace: VBAT | NC | USB | PB9 | PB8 | PB5 | PB4 | PB3 | PA15 | PA11 | PB6/SCL1 | PB7/SDA1 | minh7a6 | MINH F4 | SCK2/PB13 | MOSI2/PB15 | MISO2/PB14 | RXD2/PA3 | TXD2/PA2 | RST | 3.3V | GND | PA0 | PA5 | PA6 | PA7 | PB0 | GND | NC | PA1
tValues: Unit: INCHES